# Altium PCB ice.PcbDoc (part 2 of 2)
Units mm, origin at the board's own origin, x right, y up, seen from the top; angles counter-clockwise.
Board outline 65 x 30 mm, 4 copper layers (L1 [TOP], L2 [GND], L3[PWR], L4 [BOTTOM]), stack 1.49 mm thick; 140 components, 110 nets, 478 pads, 226 vias.
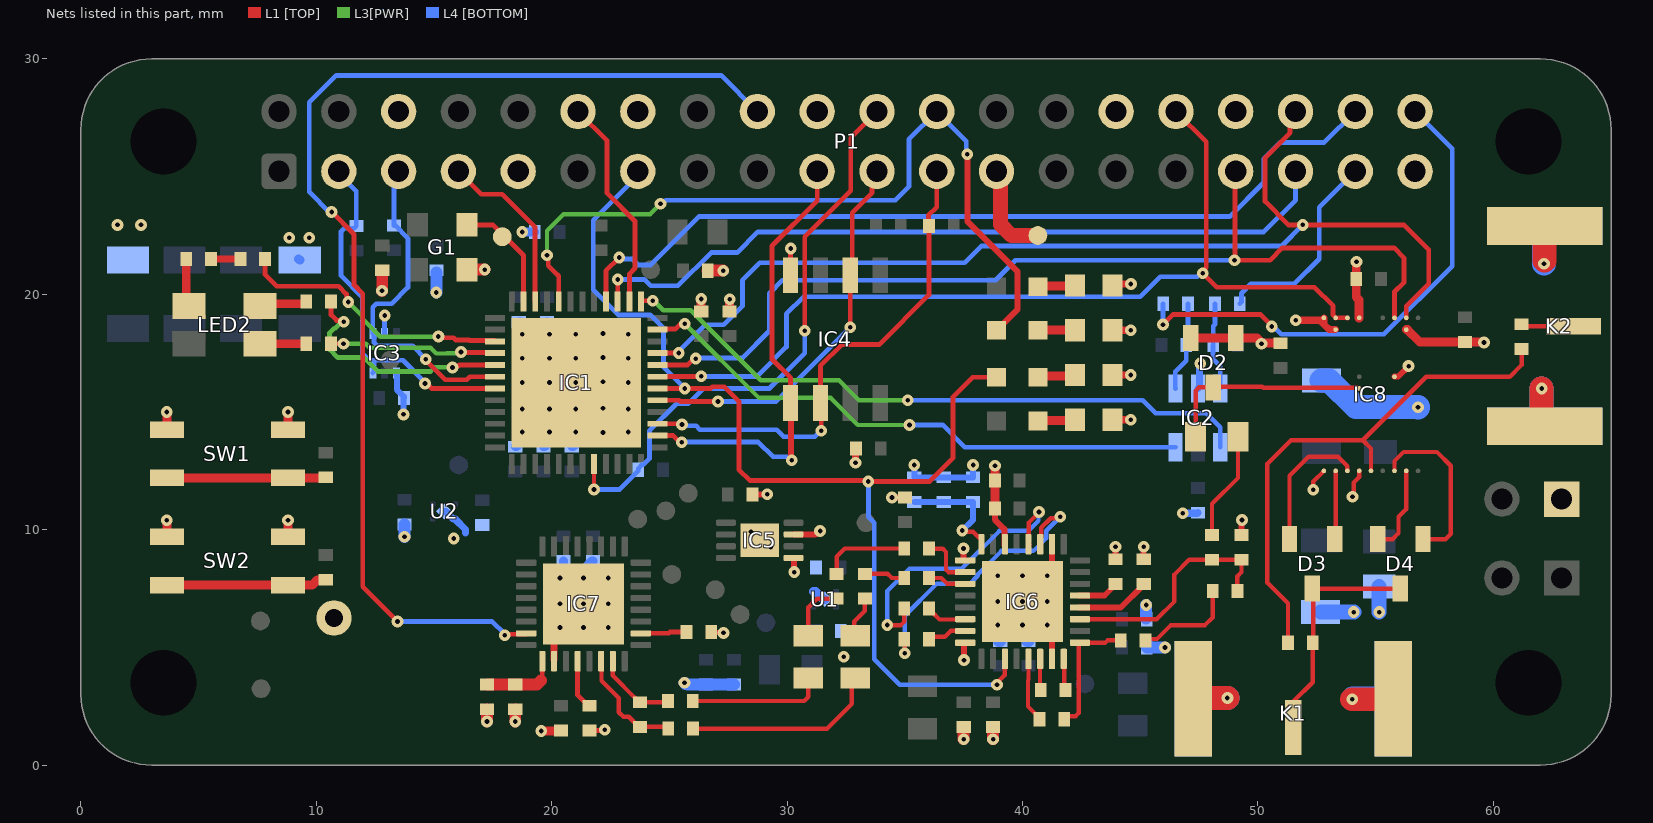
[diagram p4: the nets of this part, all layers, seen from the top]

## Via types
v1: diameter 0.5, hole 0.2, L1 [TOP] to L4 [BOTTOM], tented both sides, 226 vias

## Nets (pads, with @x,y where several pads share a name; then routed paths per layer and width w, separated by ;. In a path a pad name is that pad's centre, name@x,y a point inside that pad or via, vN(x,y) a via of type N, cw(c..) or ccw(c..) an arc to the next point about the centre after c; other vN are vias at no path point) (continued)
F_MISO: IC1.17 IC4.2 P1.21 | length 16.6
  L1 [TOP] w0.203: IC1.17@24.5,15.5 25.416,15.5 25.471,15.445 v1(27.061,15.445) ; v1(32.677,18.597) 32.677,20.75 32.762,20.835 32.762,23.462 33.609,24.309 33.609,25.019 P1.21@33.815,25.225
  L4 [BOTTOM] w0.203: v1(27.061,15.445) 29.525,15.445 v1(32.677,18.597)
F_MOSI: IC1.14 IC4.5 P1.19 | length 22.4
  L1 [TOP] w0.203: IC1.14@24.5,14 25.163,14 25.446,13.717 v1(25.518,13.717) ; IC4.5@30.3,15.8 30.2,15.7 v1(30.2,12.95) 30.2,13.022 30.145,13.077 30.145,16.455 29.357,17.243 29.357,22.057 31.275,23.975 P1.19@31.275,25.225
  L4 [BOTTOM] w0.203: v1(25.518,13.717) 25.526,13.725 28.775,13.725 29.4,13.1 v1@30.2,13.1
F_SCLK: IC1.15 IC4.6 P1.23 R14.2 | length 21.3
  L1 [TOP] w0.203: IC1.15@24.5,14.5 24.505,14.505 25.501,14.505 v1(25.535,14.471) ; v1(31.45,14.2) 31.45,15.353 IC4.6@31.415,15.388 31.415,16.965 32.317,17.867 33.917,17.867 36.025,19.975 36.025,22.75 36,22.775 36,23.35 36.355,23.705 P1.23@36.355,25.225
  L4 [BOTTOM] w0.203: v1(25.535,14.471) 25.592,14.414 26.129,14.414 26.293,14.25 29.55,14.25 29.85,13.95 31.182,13.95 31.432,14.2 v1(31.45,14.2)
GND: C1.1 C2.1 C3.1 C4.1 C5.1 C6.1 C7.1 C8.1 C9.1 C10.1 C11.1 C12.1 C13.1 C14.1 C15.2 C16.2 C17.1 C18.2 C19.1 C20.1 C28.2 C29.2 C30.2 C31.2 C32.2 C33.1 C34.1 C35.2 C36.1 C37.1 C38.1 C39.1 C40.1 C41.1 C42.1 C43.1 C44.1 C45.1 C48.1 C49.1 C50.1 C51.1 C52.1 C53.1 C54.2 C55.2 C56.1 C57.1 C58.1 C59.1 D2.1 D2.2 G1.2 IC1.49 IC2.2 IC3.2 IC3.4 IC4.4 IC5.5 IC5.7 IC5.9 IC6.10 IC6.14 IC6.17 IC6.24 IC6.31 IC6.33 IC7.26 IC7.33 IC8.A1 IC8.A4 IC8.B2 IC8.B8 IC8.F7 IC8.P1 IC8.P4 K1.2 K2.2 K4.1 LED1.1 LED3.1 LED4.1 LED5.1 P1.6 P1.9 P1.14 P1.20 P1.25 P1.30 P1.34 P1.39 R16.2 R24.1 SW1.3 SW1.4 SW2.3 SW2.4 TP20.1 TP27.1 U1.2 U1.5 U2.2 U2.5 | length 95.5
  L1 [TOP] w0.185: v1@8.8,10.35 v1(8.8,10.4) ; v1(52.35,11.7) 52.35,12.05 IC8.P1@52.8,12.5 ; v1(54.019,11.4) 54.066,11.447 54.066,12.007 54.3,12.241 IC8.P4@54.3,12.5
  L1 [TOP] w0.203: R16.2@21.6,1.475 22.225,1.475 v1(22.25,1.5) ; C31.2@26.775,5.65 26.791,5.634 27.284,5.634 v1(27.3,5.618) ; IC4.4@30.145,20.812 30.145,21.845 30.15,21.85 v1(30.15,21.95)
  L1 [TOP] w0.254: C1.1@27.55,19.275 C1.1@27.554,19.279 ; v1@27.554,19.791 v1(27.557,19.795) ; C17.1@28.525,11.5 29.14,11.5 v1(29.15,11.51) ; IC5.5@30.27,8.8 30.292,8.8 30.3,8.792 v1(30.3,8.2) ; IC5.7@30.27,9.8 30.559,9.8 30.563,9.804 31.198,9.804 31.344,9.95 v1(31.4,9.95) ; v1(34.45,11.366) 34.455,11.37 34.995,11.37 C41.1@35,11.375 ; v1(37.494,9.202) 37.494,8.728 37.52,8.703 IC6.17@37.612,8.703 ; v1(37.511,4.461) 37.511,5.172 37.536,5.197 IC6.24@37.612,5.197 ; C39.1@38.824,10.895 38.824,10.426 39.227,10.023 39.227,9.348 IC6.14@39.238,9.338 ; v1@38.825,12.716 v1(38.826,12.717) ; IC6.31@41.245,4.562 41.245,5.705 v1(40,6.95) 41.245,8.195 IC6.10@41.245,9.338 ; C30.2@43.95,8.75 v1(43.95,9.275) ; v1(45.145,9.276) 45.148,9.273 45.148,8.752 C29.2@45.15,8.75 ; C28.2@49.3,9.775 49.3,10.393 v1(49.318,10.411) ; IC8.F7@55.8,16.5 55.95,16.5 v1(56.4,16.95) ; C40.1@38.824,12.095 C40.1@38.825,12.096
  L1 [TOP] w0.3: IC7.26@20.105,4.462 IC7.33@20.105,5.605
  L1 [TOP] w0.305: IC7.33@20.105,5.605 v1(21.35,6.85) ; v1(32.9,12.85) 32.9,13.425 C16.2@32.925,13.45 ; LED5.1@43.825,14.675 v1(44.6,14.675) ; LED4.1@43.825,16.575 v1(44.6,16.575) ; LED3.1@43.825,18.475 v1(44.6,18.475) ; LED1.1@43.825,20.375 43.892,20.442 v1(44.602,20.442) ; v1(51.6,18.9) 52.623,18.9 52.8,18.723 ; IC8.A1@52.8,19 52.8,18.723 ; IC8.B2@53.3,18.5 53.023,18.5 52.8,18.723
  L1 [TOP] w0.381: SW2.3@3.65,9.7 v1(3.65,10.4) ; SW1.3@3.65,14.25 v1(3.65,15) ; SW2.4@8.8,9.7 v1@8.8,10.35 ; SW1.4@8.8,14.25 v1(8.8,15) ; v1(19.55,1.45) 20.375,1.45 C18.2@20.4,1.475 ; C2.1@26.35,19.23 v1(26.35,19.8) ; C1.1@27.554,19.279 v1@27.554,19.791 ; C39.1@38.824,10.895 C40.1@38.824,12.095 v1@38.825,12.716 ; D2.2@47.14,18.15 D2.1@49.06,18.15 49.958,18.15 v1@50.208,17.9 ; v1(50.15,17.9) v1@50.208,17.9 ; C36.1@50.95,17.925 50.275,17.925 50.25,17.9 v1@50.208,17.9 ; v1(54.185,21.383) 54.175,21.372 C32.2@54.175,20.65 54.175,19.875 54.3,19.75 IC8.A4@54.3,19 ; IC8.B8@56.3,18.5 56.35,18.5 56.875,17.975 C35.2@58.8,17.975 59.525,17.975 59.55,17.95 v1(59.6,17.95)
  L1 [TOP] w0.508: v1(12.786,20.149) 12.8,20.163 C56.1@12.8,20.918 ; G1.2@16.4,21.05 v1(17.15,21.05) ; v1(17.25,1.85) C20.1@17.25,2.375 ; v1(18.45,1.85) C19.1@18.45,2.375 ; C9.1@26.625,21 26.629,21.004 v1(27.286,21.004) ; v1(28.465,9.92) IC5.9@28.835,9.55 ; v1(37.5,1.1) C50.1@37.5,1.625 ; v1(38.75,1.1) C51.1@38.75,1.625 ; K1.2@55.725,2.8 K1.2@55.75,2.825 ; K2.2@62.05,14.525 K2.2@62.175,14.4 ; v1(62.15,21.3) 62.15,21.4 v1@62.175,21.425
  L1 [TOP] w0.635: P1.25@38.895,25.225 39.06,25.06 39.06,22.965 39.525,22.5 TP27.1@40.65,22.5
  L1 [TOP] w1.016: K1.2@47.275,2.85 v1(48.7,2.85) ; v1(54,2.8) K1.2@55.725,2.8 ; K2.2@62.05,14.525 v1(62.05,16) ; v1@62.175,21.425 K2.2@62.175,22.9
  L1 [TOP] w1.27: K1.2@47.25,2.825 K1.2@47.275,2.85
  L4 [BOTTOM] w0.203: IC3.2@12.9,18.338 12.902,18.34 v1(12.904,19.096) v1(12.904,19.096) ; C8.1@19.275,22.65 C8.1@19.278,22.647
  L4 [BOTTOM] w0.254: IC3.4@13.4,16.662 13.4,16.575 13.423,16.552 13.423,15.952 13.725,15.65 C15.2@13.725,15.6 13.713,15.587 13.713,14.913 v1(13.7,14.9) ; v1(35.4,12.75) C48.1@35.4,12.225 C49.1@36.65,12.225 R24.1@37.9,12.225 v1(37.9,12.75) ; C53.1@45.25,6.225 C53.1@45.275,6.2 ; C52.1@45.275,5 C52.1@45.277,4.998
  L4 [BOTTOM] w0.305: U2.5@15.425,10.775 15.502,10.775 15.827,10.45 U2.2@15.9,10.45 ; U2.2@15.905,10.45 U2.2@15.9,10.45 ; 16.341,9.87 16.341,10.009 U2.2@15.9,10.45 ; v1(46.8,10.7) 47.425,10.7 C14.1@47.45,10.725 ; IC2.2@47.45,16 47.514,16.064 47.514,17.034 v1(47.544,17.064)
  L4 [BOTTOM] w0.381: C58.1@9.25,21.5 C58.1@9.3,21.45 ; C3.1@18.45,13.525 18.5,13.525 18.559,13.584 18.559,13.938 18.75,14.129 v1(18.75,14.15) ; C6.1@18.6,18.825 18.65,18.825 18.71,18.766 18.71,18.362 18.75,18.321 v1(18.75,18.3) ; v1(18.75,22.65) C8.1@19.275,22.65 ; C4.1@19.65,13.525 19.7,13.525 19.759,13.584 19.759,13.988 19.9,14.129 v1(19.901,14.15) ; v1@19.774,18.3 19.787,18.313 19.787,18.812 C5.1@19.8,18.825 ; v1(20.35,7.95) 20.35,8 20.5,8.15 C42.1@20.5,8.675 ; C7.1@20.85,13.525 20.9,13.525 20.959,13.584 20.959,14.066 21.022,14.129 v1(21.022,14.15) ; v1(21.35,7.95) 21.392,7.992 21.392,8.367 21.7,8.675 C43.1@21.75,8.675 ; U1.2@31.126,7.371 31.206,7.371 31.531,7.046 U1.5@31.601,7.046
  L4 [BOTTOM] w0.508: v1(13.75,9.7) C12.1@13.75,10.225 ; v1(15.096,20.074) 15.098,20.077 15.098,20.928 C57.1@15.1,20.93 ; v1(25.639,3.5) 25.689,3.45 25.75,3.45 25.775,3.425 C33.1@26.55,3.425 C34.1@27.75,3.425 ; v1(38.95,5.95) 39.004,5.896 39.004,5.279 39.008,5.275 C37.1@39.05,5.275 ; v1(40,5.95) 40.204,5.746 40.204,5.279 40.208,5.275 C38.1@40.25,5.275 ; C53.1@45.25,6.225 v1(45.25,6.8) ; C52.1@45.277,4.998 45.279,5 v1(46.05,5) ; v1(54,2.8) v1@54.025,2.825 ; K2.2@62.05,14.525 K2.2@62.175,14.4 ; K2.2@62.15,22.875 K2.2@62.175,22.9
  L4 [BOTTOM] w0.635: C45.1@52.65,6.5 v1(54.071,6.5) ; v1(55.15,6.5) C44.1@55.15,7.595
  L4 [BOTTOM] w1.016: K1.2@47.25,2.825 47.275,2.85 v1(48.7,2.85) ; C55.2@52.7,16.348 53.017,16.348 54.16,15.205 C54.2@55.2,15.205 56.795,15.205 v1(56.8,15.2) ; v1@54.025,2.825 K1.2@55.75,2.825 ; K2.2@62.05,14.525 v1(62.05,16) ; v1(62.15,21.3) K2.2@62.15,22.875
  other v1: 32.4,4.6 20.35,5.85 21.35,5.85 22.4,5.85 41.05,5.95 20.35,6.85 22.4,6.85 38.95,6.95 41.05,6.95 22.4,7.95 38.95,8.05 40,8.05 41.05,8.05 29.3,9.25 15.837,9.627 22.175,14.132 23.25,14.15 18.75,15.128 19.901,15.128 21.022,15.128 23.25,15.128 22.175,15.16 18.75,16.25 19.901,16.25 21.022,16.25 23.25,16.25 22.175,16.282 18.75,17.286 19.901,17.286 21.022,17.286 23.25,17.286 22.175,17.318 19.901,18.3 21.022,18.3 23.25,18.3 22.175,18.332 8.85,22.4 9.7,22.4 1.55,22.95 2.55,22.95
HILO: IC1.18 IC6.27 P1.13 R10.1 | length 48.5
  L1 [TOP] w0.185: P1.13@23.655,24.869 P1.13@23.655,25.225 ; v1(38.914,3.413) 38.914,3.499 39.238,3.823 IC6.27@39.238,4.562
  L1 [TOP] w0.203: IC1.18@24.5,16 v1(25.651,15.999) ; v1@25.65,16.001 25.651,16.003 26.745,16.003 26.814,16.071 27.337,16.071 27.95,15.458 27.95,12.55 28.408,12.092 33.408,12.092 v1(33.45,12.05) 36.05,12.05 37.05,13.05 37.05,15.65 37.875,16.475 R10.1@38.9,16.475
  L4 [BOTTOM] w0.203: P1.13@23.655,25.225 23.655,25.031 21.762,23.137 21.762,20.188 22.825,19.125 24.175,19.125 24.75,18.55 24.75,16.904 25.651,16.003 v1(25.651,15.999) ; v1(33.45,12.05) 33.45,10.55 33.7,10.3 33.7,4.5 34.787,3.413 v1(38.914,3.413)
HV_EN: IC1.34 P1.7 | length 7.4
  L1 [TOP] w0.203: P1.7@16.035,25.225 17.01,24.25 17.9,24.25 19.293,22.857 19.293,19.707 IC1.34@19.3,19.7
ICE_CS: IC1.32 P1.24 R8.1 | length 34.1
  L1 [TOP] w0.203: v1(19.8,21.662) 19.857,21.606 19.857,21.222 20.26,20.818 20.26,20.815 20.3,20.776 IC1.32@20.3,19.7
  L1 [TOP] w0.254: v1(37.65,25.95) 37.652,25.948 37.652,23.098 39.775,20.975 39.775,19.35 R8.1@38.9,18.475
  L3[PWR] w0.185: v1(19.8,21.662) 19.8,22.7 20.5,23.4 24.178,23.4 v1(24.624,23.847)
  L4 [BOTTOM] w0.203: v1(24.624,23.847) 24.699,23.847 24.852,24 34.6,24 35.175,24.575 35.175,26.585 P1.24@36.355,27.765 37.611,26.509 37.611,25.989 v1(37.65,25.95)
Lblue: IC1.41 R5.2 | length 10.3
  L1 [TOP] w0.203: R5.2@10.625,19.7 10.625,19.125 10.858,18.892 11.108,18.892 v1(11.165,18.835) ; v1(15.784,16.891) 15.841,16.948 16.028,16.948 16.082,17.002 17.598,17.002 IC1.41@17.6,17
  L3[PWR] w0.203: v1(11.165,18.835) 11.084,18.835 10.812,18.563 10.764,18.563 10.564,18.364 10.564,17.657 10.907,17.314 12.036,17.314 12.63,16.72 14.848,16.72 15.026,16.898 15.777,16.898 v1(15.784,16.891)
Lgreen: IC1.40 R7.2 | length 7.2
  L1 [TOP] w0.203: R7.2@10.625,17.9 v1(11.15,17.9) ; v1(16.15,17.55) 16.177,17.523 17.577,17.523 IC1.40@17.6,17.5
  L3[PWR] w0.185: v1(11.15,17.9) 12.1,17.9 12.268,17.732 14.855,17.732 15.097,17.489 15.542,17.489 ; 15.543,17.49 16.09,17.49 v1(16.15,17.55)
Lred: IC1.39 R2.2 | length 11.8
  L1 [TOP] w0.203: R2.2@7.825,21.5 7.825,20.831 8.313,20.342 10.946,20.342 11.276,20.012 11.276,19.948 11.306,19.918 11.306,19.723 v1(11.359,19.67) ; v1(15.185,18.209) 15.242,18.153 15.83,18.153 15.923,18.059 16.481,18.059 16.497,18.044 16.975,18.044 16.986,18.033 17.567,18.033 IC1.39@17.6,18
  L3[PWR] w0.185: v1(11.359,19.67) 11.956,19.073 11.956,18.959 12.715,18.2 15.176,18.2 v1(15.185,18.209)
NetC19_2: C19.2 C20.2 IC7.25 | length 3.2
  L1 [TOP] w0.203: 19.55,3.65 19.597,3.697 IC7.25@19.597,4.462
  L1 [TOP] w0.508: C20.2@17.25,3.425 C19.2@18.45,3.425 19.37,3.425 19.55,3.605
NetC21_1: C21.1 IC6.30 | length 1.4
  L1 [TOP] w0.185: C21.1@40.725,3.2 40.744,3.219 40.744,4.544 IC6.30@40.762,4.562
NetC21_2: C21.2 IC6.32 | length 1.4
  L1 [TOP] w0.185: IC6.32@41.753,4.562 41.764,4.551 41.764,3.211 C21.2@41.775,3.2
NetC22_1: C22.1 IC6.1 R17.2 | length 5.5
  L1 [TOP] w0.185: C22.1@41.775,1.95 41.908,2.083 42.252,2.083 42.388,2.218 42.388,5.197 43.505,5.197 43.608,5.3 R17.2@44.175,5.3
NetC22_2: C22.2 IC6.29 | length 2.8
  L1 [TOP] w0.185: IC6.29@40.25,4.515 40.254,4.511 40.254,3.625 40.23,3.601 40.23,2.495 40.725,2 C22.2@40.725,1.95
NetC23_1: C23.1 C25.1 C28.1 IC6.3 | length 10
  L1 [TOP] w0.185: IC6.3@42.395,6.195 45.695,6.195 46.45,6.95 46.45,8.1 47.075,8.725 C25.1@48.05,8.725 49.258,8.725 C28.1@49.3,8.725 49.3,8.2 49.125,8.025 C23.1@49.125,7.4
NetC23_2: C23.2 R17.1 | length 4.4
  L1 [TOP] w0.185: R17.1@45.225,5.3 45.284,5.359 45.709,5.359 46.3,5.95 47.75,5.95 48.075,6.275 C23.2@48.075,7.4
NetC24_1: C24.1 IC7.30 R18.2 | length 4.9
  L1 [TOP] w0.185: IC7.30@22.112,4.462 22.112,3.588 22.85,2.85 22.85,2.25 23.046,2.054 23.271,2.054 23.7,1.625 C24.1@23.75,1.625 24.875,1.625 R18.2@24.95,1.55
NetC24_2: C24.2 IC7.31 R15.2 | length 3.5
  L1 [TOP] w0.185: IC7.31@22.595,4.462 22.595,3.805 23.542,2.858 23.542,2.833 23.7,2.675 C24.2@23.75,2.675 24.89,2.675 R15.2@24.942,2.727
NetC25_2: C25.2 L3.2 | length 4.6
  L1 [TOP] w0.185: C25.2@48.05,9.775 48.05,11.1 49.15,12.2 L3.2@49.15,13.95
NetC26_1: C26.1 L1.1 | length 2.6
  L1 [TOP] w0.185: L1.1@30.9,5.5 30.9,6.7 31.275,7.075 C26.1@32.1,7.075
NetC26_2: C26.2 R19.2 | length 3.7
  L1 [TOP] w0.185: C26.2@32.1,8.125 32.1,8.85 32.45,9.2 R19.2@34.975,9.2
NetC27_1: C27.1 L2.1 | length 1.8
  L1 [TOP] w0.185: L2.1@32.9,5.5 32.85,5.55 32.85,6.1 33.3,6.55 C27.1@33.3,7.075
NetC27_2: C27.2 R20.2 | length 1.7
  L1 [TOP] w0.185: C27.2@33.3,8.125 34.275,8.125 34.45,7.95 R20.2@34.975,7.95
NetC29_1: C29.1 IC6.4 | length 3.1
  L1 [TOP] w0.254: IC6.4@42.388,6.696 44.171,6.696 C29.1@45.1,7.625
NetC30_1: C30.1 IC6.5 | length 1.8
  L1 [TOP] w0.254: IC6.5@42.388,7.204 43.479,7.204 43.95,7.675 C30.1@44,7.675
NetC31_1: C31.1 IC7.2 | length 2
  L1 [TOP] w0.185: IC7.2@23.738,5.605 24.537,5.605 24.543,5.6 24.957,5.6 24.963,5.605 24.98,5.605
  L1 [TOP] w0.203: 24.98,5.605 25.025,5.65 C31.1@25.725,5.65
NetC46_1: C46.1 IC6.11 | length 12.2
  L1 [TOP] w0.185: C46.1@34.975,5.35 35,5.325 v1(35,4.75) ; IC6.11@40.762,9.697 40.788,9.723 40.788,10.08 41.197,10.49 41.54,10.49 v1(41.6,10.55)
  L4 [BOTTOM] w0.185: v1(35,4.75) 35,6.35 36.35,7.7 37.75,7.7 38.1,8.05 38.1,8.1 39.1,9.1 40.461,9.1 41.004,9.643 41.004,9.954 v1(41.6,10.55)
NetC46_2: C46.2 IC6.23 | length 1.7
  L1 [TOP] w0.185: C46.2@36.025,5.45 36.7,5.45 36.955,5.705 IC6.23@37.612,5.705
NetC47_1: C47.1 IC6.12 | length 12.4
  L1 [TOP] w0.185: v1(34.25,5.95) 34.832,5.95 34.968,6.085 34.968,6.643 C47.1@34.975,6.65 ; IC6.12@40.288,9.371 40.268,9.391 40.268,10.306 40.7,10.737 v1(40.7,10.75)
  L4 [BOTTOM] w0.185: v1(34.25,5.95) 34.25,7.4 35.2,8.35 37.416,8.35 39.016,9.95 40.244,9.95 40.679,10.385 40.679,10.729 v1(40.7,10.75)
NetC47_2: C47.2 IC6.22 | length 1.8
  L1 [TOP] w0.185: C47.2@36.025,6.7 36.183,6.542 36.183,6.477 36.472,6.188 IC6.22@37.612,6.188
NetC48_2: C48.2 C49.2 IC6.16 R24.2 | length 5.1
  L1 [TOP] w0.185: v1(37.442,9.966) 37.494,9.913 37.896,9.913 38.157,9.652 38.187,9.652 38.247,9.592 IC6.16@38.247,9.338
  L4 [BOTTOM] w0.254: C48.2@35.4,11.175 C49.2@36.65,11.175 R24.2@37.9,11.175 37.9,10.424 v1(37.442,9.966)
NetD2_3: D2.3 IC8.G4 L3.1 | length 9
  L1 [TOP] w0.185: L3.1@47.35,13.95 47.362,13.963 47.362,15.915 47.498,16.05 D2.3@48.1,16.05 48.125,16.075 50.175,16.075 50.225,16.025 54.209,16.025 54.232,16.003 54.297,16.003 IC8.G4@54.3,16
NetD3_1: D3.1 IC8.P2 | length 2.9
  L1 [TOP] w0.185: D3.1@53.26,9.6 53.3,9.64 IC8.P2@53.3,12.5
NetD3_2: D3.2 IC8.P3 | length 5.9
  L1 [TOP] w0.185: D3.2@51.34,9.6 51.34,12.29 52.15,13.1 53.4,13.1 53.797,12.703 53.797,12.503 IC8.P3@53.8,12.5
NetD3_3: D3.3 D4.3 K1.1 R22.1 | length 10.6
  L1 [TOP] w0.185: K1.1@51.5,1 51.5,2.7 52.325,3.525 R22.1@52.325,5.2 52.35,5.225 52.35,7.45 D3.3@52.3,7.5 D4.3@56.05,7.5
NetD4_1: D4.1 IC8.P7 | length 7.4
  L1 [TOP] w0.185: IC8.P7@55.8,12.5 55.8,12.915 56.185,13.3 57.6,13.3 58.185,12.715 58.185,9.82 57.965,9.6 D4.1@57.01,9.6
NetD4_2: D4.2 IC8.P8 | length 3.8
  L1 [TOP] w0.185: D4.2@55.09,9.6 55.714,9.6 55.97,9.856 55.97,10.548 56.3,10.877 IC8.P8@56.3,12.5
NetIC2_1: IC2.1 R30.2 R31.2 | length 3.6
  L4 [BOTTOM] w0.203: IC2.1@46.5,16 46.49,16.01 46.49,16.719 46.95,17.179 R30.2@46.95,17.65 ; R30.2@46.95,17.85 46.95,18.6 47.025,18.675 R31.2@47.025,19.6
NetIC2_3: IC2.3 R29.2 R32.2 | length 3.8
  L4 [BOTTOM] w0.203: R32.2@48.175,19.6 48.175,18.725 48.1,18.65 R29.2@48.1,17.85 48.084,17.834 48.084,17.266 48.4,16.95 IC2.3@48.4,16
NetIC7_28: IC7.28 R16.1 | length 2.2
  L1 [TOP] w0.185: IC7.28@21.096,4.361 IC7.28@21.096,4.462
  L1 [TOP] w0.203: IC7.28@21.096,4.361 21.096,2.979 21.55,2.525 R16.1@21.6,2.525
NetK2_1: K2.1 R23.2 | length 2.6
  L1 [TOP] w0.185: R23.2@61.2,18.725 61.275,18.65 K2.1@63.75,18.65
NetL1_2: L1.2 R15.1 | length 5.8
  L1 [TOP] w0.185: R15.1@25.992,2.727 30.727,2.727 30.9,2.9 L1.2@30.9,3.7
NetL2_2: L2.2 R18.1 | length 8.3
  L1 [TOP] w0.185: R18.1@26,1.55 31.693,1.55 32.75,2.607 32.75,3.55 L2.2@32.9,3.7
NetLED1_2: LED1.2 R4.2 | length 1.6
  L1 [TOP] w0.381: R4.2@40.65,20.325 40.675,20.35 42.2,20.35 LED1.2@42.225,20.375
NetLED2_1: LED2.1 R1.1 | length 2.1
  L1 [TOP] w0.381: R1.1@4.475,21.5 4.475,19.625 LED2.1@4.6,19.5
NetLED2_3: LED2.3 R5.1 | length 2.1
  L1 [TOP] w0.381: LED2.3@7.6,19.5 7.7,19.6 9.516,19.6 9.575,19.66 R5.1@9.575,19.7
NetLED2_4: LED2.4 R7.1 | length 2
  L1 [TOP] w0.381: LED2.4@7.6,17.9 R7.1@9.575,17.9
NetLED3_2: LED3.2 R8.2 | length 1.6
  L1 [TOP] w0.381: R8.2@40.65,18.475 LED3.2@42.225,18.475
NetLED4_2: LED4.2 R10.2 | length 1.6
  L1 [TOP] w0.381: R10.2@40.65,16.475 40.7,16.525 42.175,16.525 LED4.2@42.225,16.575
NetLED5_2: LED5.2 R9.2 | length 1.6
  L1 [TOP] w0.381: R9.2@40.65,14.625 40.675,14.65 42.2,14.65 LED5.2@42.225,14.675
NetR1_2: R1.2 R2.1 | length 1.3
  L1 [TOP] w0.305: R1.2@5.525,21.5 R2.1@6.775,21.5
NetR21_1: R21.1 SW2.1 SW2.2 | length 6.8
  L1 [TOP] w0.381: SW2.1@3.65,7.65 SW2.2@8.8,7.65 9.82,7.65 10.045,7.875 R21.1@10.4,7.875
NetR26_1: R26.1 SW1.1 SW1.2 | length 7
  L1 [TOP] w0.381: SW1.1@3.65,12.2 SW1.2@8.8,12.2 ; SW1.2@8.55,12.2 10.375,12.2 R26.1@10.4,12.225
OutRange: IC7.23 P1.18 | length 49.6
  L1 [TOP] w0.185: v1(18,5.514) 18.046,5.56 18.916,5.56 IC7.23@18.962,5.605
  L1 [TOP] w0.203: v1(10.65,23.5) 11.6,22.55 11.6,20.4 11.976,20.024 11.976,7.574 v1(13.45,6.1)
  L4 [BOTTOM] w0.203: v1@10.6,23.45 9.7,24.35 9.7,28.15 10.85,29.3 27.2,29.3 P1.18@28.735,27.765 ; v1(13.45,6.1) 17.474,6.1 18,5.574 v1(18,5.514)
PCM_CLK: IC1.26 P1.12 | length 9.2
  L1 [TOP] w0.203: P1.12@21.115,27.765 22.35,26.53 22.35,24.3 23.537,23.113 23.537,21.107 23.308,20.878 23.308,20.423 23.3,20.415 IC1.26@23.3,19.7
PCM_DIN: IC1.28 P1.38 | length 36.8
  L1 [TOP] w0.203: IC1.28@22.3,19.7 22.3,20.998 v1(22.864,21.562)
  L4 [BOTTOM] w0.203: v1(22.864,21.562) 22.92,21.505 23.409,21.505 23.664,21.25 24.2,21.25 26.25,23.3 48.8,23.3 50.25,24.75 50.25,25.75 50.95,26.45 52.82,26.45 P1.38@54.135,27.765
PCM_FS: IC1.27 P1.35 | length 32.6
  L1 [TOP] w0.185: IC1.27@22.8,19.7 22.802,19.702 22.802,20.629 v1(22.804,20.631)
  L4 [BOTTOM] w0.203: v1(22.804,20.631) 23.933,20.631 24.205,20.36 25.36,20.36 26.775,21.775 27.875,21.775 28.75,22.65 50.25,22.65 51.595,23.995 P1.35@51.595,25.225
Pdamp: IC1.19 IC8.A2 IC8.A3 P1.32 | length 40.4
  L1 [TOP] w0.203: IC1.19@24.5,16.5 24.508,16.508 26.344,16.508 v1(26.352,16.515) ; P1.32@46.515,27.765 47.8,26.48 47.8,21.13 47.65,20.98 v1(47.65,20.9) 48.25,20.3 52.4,20.3 53.192,19.508 53.192,19.112 53.3,19.004 IC8.A2@53.3,19 53.303,19.003 53.368,19.003 53.369,19.004 53.792,19.004 53.796,19 IC8.A3@53.8,19
  L4 [BOTTOM] w0.203: v1(26.352,16.515) 26.362,16.505 28.705,16.505 29.966,17.767 29.966,19.167 30.7,19.9 45,19.9 45.85,20.75 47.425,20.75 47.575,20.9 v1(47.65,20.9)
PHV: IC1.21 IC8.A8 P1.36 | length 45.8
  L1 [TOP] w0.203: IC1.21@24.5,17.5 24.502,17.502 25.398,17.502 v1(25.4,17.504) ; P1.36@51.595,27.765 51.366,27.536 51.366,26.866 50.3,25.8 50.3,23.945 51.295,22.95 v1(51.9,22.95) 56.2,22.95 57.25,21.9 57.25,20.45 56.3,19.5 IC8.A8@56.3,19
  L4 [BOTTOM] w0.203: v1(25.4,17.504) 25.4,17.576 26.527,18.703 27.303,18.703 28.1,19.5 28.1,20.6 28.844,21.344 37.544,21.344 38.25,22.05 51,22.05 v1(51.9,22.95)
PnHV: IC1.20 IC8.A7 P1.33 | length 41.4
  L1 [TOP] w0.203: IC1.20@24.5,17 25.769,17 26.038,17.268 v1(26.118,17.268) ; P1.33@49.055,25.225 49.027,25.198 49.027,21.477 v1(49,21.45) 50.515,21.45 51.035,21.97 55.78,21.97 56.2,21.55 56.2,20.5 55.8,20.1 IC8.A7@55.8,19
  L4 [BOTTOM] w0.203: v1(26.118,17.268) 26.14,17.29 28.09,17.29 29.25,18.45 29.25,20.05 29.8,20.6 38.85,20.6 39.7,21.45 v1(49,21.45)
RCLK: G1.3 IC1.35 TP6.1 | length 4.9
  L1 [TOP] w0.203: G1.3@16.4,22.95 17.5,22.95 18.8,21.65 IC1.35@18.8,19.7
RESET: IC1.8 P1.22 R3.2 | length 24.7
  L1 [TOP] w0.185: v1(21.794,11.709) 21.797,11.712 21.797,12.797 IC1.8@21.8,12.8
  L1 [TOP] w0.203: v1(30.75,18.45) 30.75,22.45 32.7,24.4 32.7,26.65 P1.22@33.815,27.765
  L4 [BOTTOM] w0.203: v1(21.794,11.709) v1(21.794,11.709) 22.885,11.71 23.675,12.5 23.675,12.6 23.833,12.758 23.883,12.758 24.15,13.025 24.15,14.2 25.3,15.35 25.8,15.35 26.45,16 29.25,16 30.75,17.5 v1(30.75,18.45)
SCL: IC1.42 IC3.1 P1.5 R12.2 | length 14.6
  L1 [TOP] w0.203: v1(14.65,17.237) 14.65,17.199 15.478,16.371 16.4,16.371 16.528,16.5 IC1.42@17.6,16.5
  L4 [BOTTOM] w0.203: IC3.1@12.4,18.338 IC3.1@12.4,18.396 ; P1.5@13.495,25.225 13.3,25.03 13.3,23.9 R12.2@13.3,22.925 13.35,22.925 13.892,22.383 13.892,20.292 13.2,19.6 12.549,19.6 12.4,19.451 IC3.1@12.4,18.396 ; v1(14.65,17.237) 14.65,17.25 14.092,17.808 12.589,17.808 12.454,17.943 12.454,18.342 IC3.1@12.4,18.396
SDA: IC1.43 IC3.6 P1.3 R11.2 | length 15.8
  L1 [TOP] w0.203: v1(14.614,16.21) 14.694,16.21 14.904,16 IC1.43@17.6,16
  L4 [BOTTOM] w0.203: P1.3@10.955,25.225 10.955,25.132 11.7,24.387 R11.2@11.7,22.9 11.604,22.804 11.185,22.804 11.05,22.669 11.05,20.794 11.958,19.887 11.958,17.5 12.258,17.2 12.455,17.2 13.682,17.2 14.614,16.268 v1(14.614,16.21) ; IC3.6@12.4,16.662 12.455,16.717 12.455,17.198 12.457,17.2
TOP_T1: IC1.23 IC2.6 | length 24.3
  L1 [TOP] w0.203: IC1.23@24.5,18.5 24.523,18.523 25.25,18.523 25.42,18.693 25.595,18.693 v1(25.652,18.75)
  L3[PWR] w0.185: v1(25.652,18.75) 28.802,15.6 31.85,15.6 33,14.45 v1(35.2,14.45)
  L4 [BOTTOM] w0.203: v1(35.2,14.45) 36.6,14.45 37.55,13.5 IC2.6@46.5,13.5
TOP_T1_in: P1.40 R31.1 | length 22.1
  L1 [TOP] w0.203: v1(45.963,18.713) 46.387,19.137 50.113,19.137 50.589,18.661 v1(50.589,18.631)
  L4 [BOTTOM] w0.185: R31.1@45.963,19.587 R31.1@45.975,19.6
  L4 [BOTTOM] w0.203: v1(45.963,18.713) R31.1@45.963,19.587 ; v1(50.589,18.631) 50.663,18.631 50.995,18.3 55.35,18.3 58.25,21.2 58.25,26.19 P1.40@56.675,27.765
TOP_T2: IC1.25 IC2.4 | length 27.7
  L1 [TOP] w0.203: IC1.25@23.8,19.7 23.828,19.728 v1(24.289,19.728)
  L3[PWR] w0.185: v1(24.289,19.728) 24.333,19.728 24.735,19.326 25.904,19.326 28.881,16.35 32.2,16.35 33.05,15.5 v1(35.122,15.5)
  L4 [BOTTOM] w0.203: v1(35.122,15.5) 45.1,15.5 45.65,14.95 47.804,14.95 48.4,14.354 IC2.4@48.4,13.5
TOP_T2_in: P1.37 R32.1 | length 8.7
  L4 [BOTTOM] w0.203: R32.1@49.225,19.6 49.3,19.675 49.3,20.05 49.7,20.45 51.55,20.45 52.6,21.5 52.6,23.69 P1.37@54.135,25.225
VOH2: IC6.18 R19.1 | length 2.4
  L1 [TOP] w0.185: R19.1@36.025,9.2 36.035,9.19 36.615,9.19 36.75,9.055 36.75,8.302 36.853,8.199 IC6.18@37.565,8.2
VOL2: IC6.19 R20.1 | length 1.7
  L1 [TOP] w0.185: R20.1@36.025,7.95 36.55,7.95 36.788,7.712 IC6.19@37.612,7.712
XDCR: IC8.P5 R22.2 R23.1 | length 22.6
  L1 [TOP] w0.185: R22.2@51.275,5.2 51.275,6.875 50.4,7.75 50.4,12.8 51.4,13.8 54.45,13.8 ; IC8.P5@54.8,12.5 54.8,13.45 54.45,13.8 ; R23.1@61.2,17.675 61.2,17 60.7,16.5 57.15,16.5 54.45,13.8
pads on no net: IC3.3 IC6.6 IC6.8 IC6.9 IC6.20 IC7.7 IC7.8 IC7.9 IC7.10 P1.11 P1.15 P1.17 P1.27 P1.28 P1.31

## Polygon pours and split planes (outlines as drawn)
+3V3_IN on L4 [BOTTOM] "+3V3_IN_L04_P022" (solid, pour order 22): 5.9,21.1 5.9,25.6 6.7,26.4 8.75,26.4 9.35,25.8 9.35,24.25 7.95,22.85 7.95,20.9 7.65,20.6 6.1,20.6 5.9,20.8
+1V2 on L4 [BOTTOM] "+1V2_L04_P036" (solid, pour order 36): 17.4,13.275 17.4,11.75 17.75,11.4 19.5,11.4 20.195,12.095 20.195,12.645 20.45,12.9 21.15,12.9 21.3,12.75 21.3,11.95 20.15,10.8 16.004,10.8 15.3,11.504 15.3,13.275
5VLNA on L4 [BOTTOM] "5VLNA_L04_P014" (solid, pour order 14): 45.25,3 45.213,2.963 42.012,2.963 41.764,3.211 41.764,4.014 42.75,5 42.75,8.5 43,8.75 44.25,8.75 44.75,8.25 44.75,4.75 45.25,4.25
+3V3 on L4 [BOTTOM] "+3V3_L04_P007" (solid, pour order 7): 13.356,11.884 13.39,11.85 14.81,11.85 15.04,11.619 15.04,10.967 13.356,10.967
+1V8 on L4 [BOTTOM] "+1V8_L04_P021" (solid, pour order 21): 30.2,5.25 30.1,5.35 28.65,5.35 28.4,5.6 28.4,6.6 28.65,6.85 31.2,6.85 31.6,6.45 31.6,3.5 31.35,3.25 30.428,3.25 30.201,3.476
+3V3 on L4 [BOTTOM] "+3V3_L04_P006" (solid, pour order 6): 31.75,8.4 31.75,7.421 32.1,7.071 32.1,6.55 32.6,6.55 33,6.95 33,8.45 32.8,8.65 32,8.65
GND on L4 [BOTTOM] "GND_L04_P029" (solid, pour order 29): 17.339,10.466 17.325,10.48 16.175,10.48 16.159,10.496 15.715,10.052 15.339,9.676 15.339,9.316 15.539,9.116 15.939,9.116 16.439,9.616 17.239,9.616 17.499,9.877 17.499,10.357
GND on L4 [BOTTOM] "GND_L04_P035" (solid, pour order 35): 20.05,8.25 22.75,8.25 22.75,5.5 20.05,5.5
GND on L4 [BOTTOM] "GND_L04_P034" (solid, pour order 34): 18.3,18.6 23.65,18.6 23.65,13.671 18.3,13.671
GND on L4 [BOTTOM] "GND_L04_P033" (solid, pour order 33): 8.4,20.8 10.3,20.8 10.3,22.45 9.95,22.8 8.7,22.8 8.4,22.5
GND on L4 [BOTTOM] "GND_L04_P032" (solid, pour order 32): 1.1,20.8 3,20.8 3,23.9 2.8,24.1 1.3,24.1 1.1,23.9
GND on L4 [BOTTOM] "GND_L04_P030" (solid, pour order 30): 32.85,6.05 32.85,4.35 32.7,4.2 32.15,4.2 31.95,4.4 31.95,6.05
GND on L4 [BOTTOM] "GND_L04_P008" (solid, pour order 8): 30,8.65 31.35,8.65 31.45,8.55 31.45,7.37 31.28,7.2 30.15,7.2 30,7.35
+5V_IN on L4 [BOTTOM] "+5V_IN_L04_P016" (solid, pour order 16): 3.5,20.8 5.4,20.8 5.4,23.9 5.2,24.1 3.7,24.1 3.5,23.9
+3V3 on L4 [BOTTOM] "+3V3_L04_P024" (solid, pour order 24): 5.9,19.2 5.9,17.75 6.05,17.6 6.05,15.9 6.3,15.65 8.65,15.65 10.2,15.65 10.45,15.9 10.45,19.1 10.15,19.4 6.05,19.4
+1V8f on L4 [BOTTOM] "+1V8F_L04_P003" (solid, pour order 3): 29.294,5.2 29.694,4.8 29.699,3.399 29.55,3.25 28.6,3.25 28.5,3.35 28.5,3.75 28.25,4 25.95,4 25.75,4.2 25.75,5 25.95,5.2
+5V on L4 [BOTTOM] "+5V_L04_P023" (solid, pour order 23): 43.1,2.15 42.8,1.85 42.8,0.85 43.1,0.55 45.3,0.55 45.3,2.15
GND on L4 [BOTTOM] "GND_L04_P019" (solid, pour order 19): 38.5,8.6 41.65,8.6 41.65,5.3 38.5,5.3
+5V on L4 [BOTTOM] "+5V_L04_P013" (solid, pour order 13): 3.09,15.741 3.25,16.028 3.25,16.59 3.25,16.681 3.25,17.25 3.75,17.75 5.25,17.75 5.5,18 5.5,19.1 5.25,19.35 1.2,19.35 1,19.15 1,16.25 1.509,15.741
+3V3 on L3[PWR] "+3V3_L03_P020" (solid, pour order 20): -0.05,30 -0.05,-0.05 65.05,-0.05 65.05,30
+5V on L3[PWR] "+5V_L03_P015" (solid, pour order 15): 3.45,18.25 3.45,15.9 5.5,13.85 5.5,8.25 9.75,4 46.5,4 49.7,7.2 49.7,19.45 52.25,22 56.25,22 56.5,22 57.5,21 57.5,17 59.25,15.25 63.5,15.25 64.75,14 64.75,8.75 64.75,0 0,0 0,18.25
+5V_IN on L3[PWR] "+5V_IN_L03_P009" (solid, pour order 9): 11.75,29.85 11.7,29.8 -0.05,29.8 -0.05,21.4 0.05,21.3 5.3,21.3 6.15,22.15 6.15,25.55 7.2,26.6 11.95,26.6 12.2,26.85 12.2,29.2
0V9 on L3[PWR] "0V9_L03_P010" (solid, pour order 10): 37.535,3.865 37.535,12.585 38.45,13.5 41.3,13.5 41.9,12.9 41.9,11.75 41.35,11.2 40,11.2 38.5,9.7 38.5,5.4 39,4.9 40.15,4.9 40.744,4.306 40.722,3.722 40.5,3.5 37.9,3.5
+1V8f on L3[PWR] "+1V8F_L03_P004" (solid, pour order 4): 24.8,5.65 25.4,5.65 25.75,5.3 25.75,4.384 25.5,4.134 19.566,4.134 18.75,4.95 18.35,4.95 18.05,4.65 18.05,3.95 18.4,3.6 20.546,3.6 21.471,2.675 26.625,2.675 27.1,3.15 27.1,5.9 26.404,6.596 24.48,6.596 24.48,5.97
5VVGA on L3[PWR] "5VVGA_L03_P005" (solid, pour order 5): 36.25,5.4 35.53,4.68 35.53,3.995 35.69,3.835 36.985,3.835 37.249,4.099 37.249,6.813 36.962,7.101 36.452,7.101 36.25,6.9
5VVGA on L1 [TOP] "5VVGA_L01_P038" (solid, pour order 38): 34.053,4.3 36.785,4.3 37.22,3.865 38.235,3.865 38.5,3.6 38.5,3.3 38.8,3 39,3 39.1,2.9 39.1,2.35 39.05,2.3 36.7,2.3 36.3,2.7 34.1,2.7 33.9,2.9 33.9,4.147
+2V5 on L1 [TOP] "+2V5_L01_P037" (solid, pour order 37): 24.411,20.639 24.25,20.799 24.25,22.849 24.389,22.988 24.797,23.4 26,23.4 26,20.65 25.75,20.4 24.651,20.4
+5V on L1 [TOP] "+5V_L01_P012" (solid, pour order 12): 36.35,2 34.1,2 33.85,1.75 33.85,0.65 34,0.5 36.35,0.5
GND on L2 [GND] "GND_L02_P000" (solid, pour order 0): -0.05,30 -0.05,-0.05 65.05,-0.05 65.05,30

## Silkscreen, mask and mechanical layers (free items; w line width, h text height)
Top Overlay:
  text "Pulser" at 48.15,22.15 h0.8
  text "DONE" at 35.1,19.9 h0.8
  text "ICS" at 35.1,17.9 h0.8
  text "HILO" at 35.1,16.05 h0.8
  text "PWR" at 35.14,14.2 h0.8
  text "VGA" at 35.55,12.375 h0.8
  text "USER" at 2.07,11.53 h1 r90
  text "DAC" at 29.39,11.21 h0.8
  text "FPGA" at 15.19,11.117 h0.8
  text "ADC" at 15.8,7.25 h0.8
  text "TRIG" at 2.07,6.93 h1 r90
  text "GND" at 12.1,5.8 h0.8
  text "+3V3" at 5.9,4.7 h0.8
  text "+5V" at 6.35,1.7 h0.8
Bottom Overlay:
  drawing of 5 lines, arcs and shapes, not listed
  text "lit3-32" at 39.246,20.504 h1.52
  text "un0rick.cc" at 41.496,18.004 h1.52
  text "O" at 9,3.25 h15
  text "FR000016" at 15.6,0.65 h0.95
M2_BoardOutline:
  lines w0.254: 0,27 cw(c3,27) 3,30 ; 0,27 0,27 ; 0,27 0,3 ccw(c3,3) 3,0 ; 3,0 3,0 ; 3,0 62,0 ccw(c62,3) 65,3 ; 3,30 62,30 cw(c62,27) 65,27 65,3 ; 3,30 3,30 ; 65,3 65,3
M5_StackDetails:
  drawing of 453 lines, arcs and shapes, not listed
  text "Layer" at -21.908,126.177 h1.52
  text "Name" at -11.497,126.177 h1.52
  text "Material" at 12.119,126.177 h1.52
  text "Thickness" at 33.957,126.177 h1.52
  text "Constant" at 50.463,126.177 h1.52
  text "Board Layer Stack" at 64.937,126.177 h1.52
  text "Top Overlay" at -11.497,123.129 h1.52
  text "Top Solder" at -11.497,120.081 h1.52
  text "Solder Resist" at 12.119,120.081 h1.52
  text "0.40mil" at 33.957,120.081 h1.52
  text "3.5" at 50.463,120.081 h1.52
  text "1" at -21.908,117.033 h1.52
  text "L1 [TOP]" at -11.497,117.033 h1.52
  text "1.38mil" at 33.957,117.033 h1.52
  text "Dielectric 2" at -11.497,113.985 h1.52
  text "PP-018" at 12.119,113.985 h1.52
  text "4.33mil" at 33.957,113.985 h1.52
  text "4.29" at 50.463,113.985 h1.52
  text "2" at -21.908,110.937 h1.52
  text "L2 [GND]" at -11.497,110.937 h1.52
  text "]" at 12.119,110.937 h1.52
  text "1.38mil" at 33.957,110.937 h1.52
  text "Dielectric 1" at -11.497,107.889 h1.52
  text "FR-4" at 12.119,107.889 h1.52
  text "44.49mil" at 33.957,107.889 h1.52
  text "3.96" at 50.463,107.889 h1.52
  text "3" at -21.908,104.841 h1.52
  text "L3[PWR]" at -11.497,104.841 h1.52
  text "]" at 12.119,104.841 h1.52
  text "1.38mil" at 33.957,104.841 h1.52
  text "Dielectric 3" at -11.497,101.793 h1.52
  text "PP-018" at 12.119,101.793 h1.52
  text "4.33mil" at 33.957,101.793 h1.52
  text "4.29" at 50.463,101.793 h1.52
  text "4" at -21.908,98.745 h1.52
  text "L4 [BOTTOM]" at -11.497,98.745 h1.52
  text "1.38mil" at 33.957,98.745 h1.52
  text "Bottom Solder" at -11.497,95.697 h1.52
  text "Solder Resist" at 12.119,95.697 h1.52
  text "0.40mil" at 33.957,95.697 h1.52
  text "3.5" at 50.463,95.697 h1.52
  text "Bottom Overlay" at -11.497,92.649 h1.52
M6_FabNotes:
  text "Files" at 115.3,131.35 h1.52
  text "*.GTO - Top Overlay" at 115.3,128.85 h1.52
  text "*.GTP - Top Paste" at 115.3,126.35 h1.52
  text "*.GTS - Top Solder" at 115.3,123.85 h1.52
  text "*.GTL - L1 (Positive)" at 115.3,121.35 h1.52
  text "*.G1  - L2 (Positive)" at 115.3,118.85 h1.52
  text "*.G2  - L3 (Positive)" at 115.3,116.35 h1.52
  text "*.GBL - L4 (Positive)" at 115.3,113.85 h1.52
  text "*.GBS - Bottom Solder" at 115.3,111.35 h1.52
  text "*.GBP - Bottom Paste" at 115.3,108.85 h1.52
  text "*.GBO - Bottom Overlay" at 115.3,106.35 h1.52
  text "*.GM2 - Board outline" at 115.3,103.85 h1.52
  text "*.GM5 - Stackup Details" at 115.3,101.35 h1.52
  text "*.GM6 - Fab Notes" at 115.3,98.85 h1.52
  text "*.GM11 - Mechanical dimensions" at 115.3,96.35 h1.52
  text "Board info" at 117.3,79.75 h1.52
  text "Minimum Spacing >0.152mm" at 117.3,74.75 h1.52
  text "Minimum Track >0.152mm" at 117.3,72.25 h1.52
  text "Minimum Through Hole VIA: 0.5mm (pad) / 0.2mm (drill). Drilling: L1-L4" at 117.3,70.15 h1.52
  text "1. REMOVE ALL NON-FUNCTIONAL INNER LAYER PADS." at 117.3,65.15 h1.52
  text "2. FINISHED PANEL THICKNESS IS NOT CRITICAL: TO BE APPROXIMATELY 1.6mm" at 117.25,60.45 h1.52
  text "3. BOARD FINISH: IMMERSION Au/ELECTROLESS Ni; 0.05-0.12 um GOLD; 3-6um NICKEL" at 117.25,55.45 h1.52
  text "4. OLDER RESIST: APPLY TO BOTH SIDES COLOUR - Red" at 117.25,50.45 h1.52
  text "5. COMPONENT IDENT: COLOUR TO BE WHITE" at 117.25,45.45 h1.52
Drill Drawing:
  circle w0.254: c-92.187,155.749 r0.508
  circle w0.254: c-92.187,155.749 r0.847
  lines w0.254: -93.034,147.282 -92.187,147.705 -91.341,147.282 -91.764,148.129 -91.341,148.975 -92.187,148.552 -93.034,148.975 -92.611,148.129 -93.034,147.282 ; -93.034,151.092 -91.341,151.092 -91.341,152.785 -93.034,152.785 -93.034,151.092 ; -93.034,160.405 -91.341,160.405 -92.187,158.712 -93.034,160.405
  lines w0.381: -94.553,146.139 174.206,146.139 ; -94.553,161.379 174.206,161.379 ; -80.56,142.329 -80.56,165.189 ; -65.324,142.329 -65.324,165.189 ; -36.377,142.329 -36.377,165.189 ; -23.528,142.329 -23.528,165.189 ; -4.889,142.329 -4.889,165.189 ; 29.391,142.329 29.391,165.189 ; 44.373,142.329 44.373,165.189 ; 63.316,142.329 63.316,165.189 ; 83.631,142.329 83.631,165.189 ; 105.316,142.329 105.316,165.189 ; 139.19,142.329 139.19,165.189 ; -94.553,142.329 174.206,142.329 174.206,165.189 -94.553,165.189 -94.553,142.329
  text "Symbol" at -92.267,162.522 h1.83
  text "Count" at -79.417,162.522 h1.83
  text "Hole Size" at -64.181,162.522 h1.83
  text "Plated" at -35.234,162.522 h1.83
  text "Hole Type" at -22.385,162.522 h1.83
  text "Drill Layer Pair" at -3.746,162.522 h1.83
  text "Via/Pad" at 30.534,162.522 h1.83
  text "Pad Shape" at 45.516,162.522 h1.83
  text "Template" at 64.459,162.522 h1.83
  text "Description" at 84.774,162.522 h1.83
  text "Hole Tolerance (+)" at 106.459,162.522 h1.83
  text "Hole Tolerance (-)" at 140.333,162.522 h1.83
  text "1" at -79.417,158.712 h1.52
  text "0.750mm (29.53mil)" at -64.181,158.712 h1.52
  text "PTH" at -35.234,158.712 h1.52
  text "Round" at -22.385,158.712 h1.52
  text "L1 [TOP] - L4 [BOTTOM]" at -3.746,158.712 h1.52
  text "Pad" at 30.534,158.712 h1.52
  text "Rounded" at 45.516,158.712 h1.52
  text "c150h75m0mx0" at 64.459,158.712 h1.52
  text "4" at -79.417,154.902 h1.52
  text "2.800mm (110.24mil)" at -64.181,154.902 h1.52
  text "NPTH" at -35.234,154.902 h1.52
  text "Round" at -22.385,154.902 h1.52
  text "L1 [TOP] - L4 [BOTTOM]" at -3.746,154.902 h1.52
  text "Pad" at 30.534,154.902 h1.52
  text "Rounded" at 45.516,154.902 h1.52
  text "c0hn280m180" at 64.459,154.902 h1.52
  text "44" at -79.417,151.092 h1.52
  text "0.900mm (35.43mil)" at -64.181,151.092 h1.52
  text "PTH" at -35.234,151.092 h1.52
  text "Round" at -22.385,151.092 h1.52
  text "L1 [TOP] - L4 [BOTTOM]" at -3.746,151.092 h1.52
  text "Pad" at 30.534,151.092 h1.52
  text "(Mixed)" at 45.516,151.092 h1.52
  text "(Mixed)" at 64.459,151.092 h1.52
  text "226" at -79.417,147.282 h1.52
  text "0.200mm (7.87mil)" at -64.181,147.282 h1.52
  text "PTH" at -35.234,147.282 h1.52
  text "Round" at -22.385,147.282 h1.52
  text "L1 [TOP] - L4 [BOTTOM]" at -3.746,147.282 h1.52
  text "Via" at 30.534,147.282 h1.52
  text "Rounded" at 45.516,147.282 h1.52
  text "v50h20m0mx0" at 64.459,147.282 h1.52
  text "275 Total" at -79.417,143.472 h1.52

## Dimensions
0,0 to 3,30 on Top Dimensions
0,0 to 65,3 on Top Dimensions